# Altium PCB ESP_Träger.PcbDoc
Units mil, origin at the board's own origin, x right, y up, seen from the top; angles counter-clockwise.
Board outline 1830.71 x 2960.63 mil, 2 copper layers (Top Layer, Bottom Layer); 7 components, 29 nets, 76 pads, 3 vias.
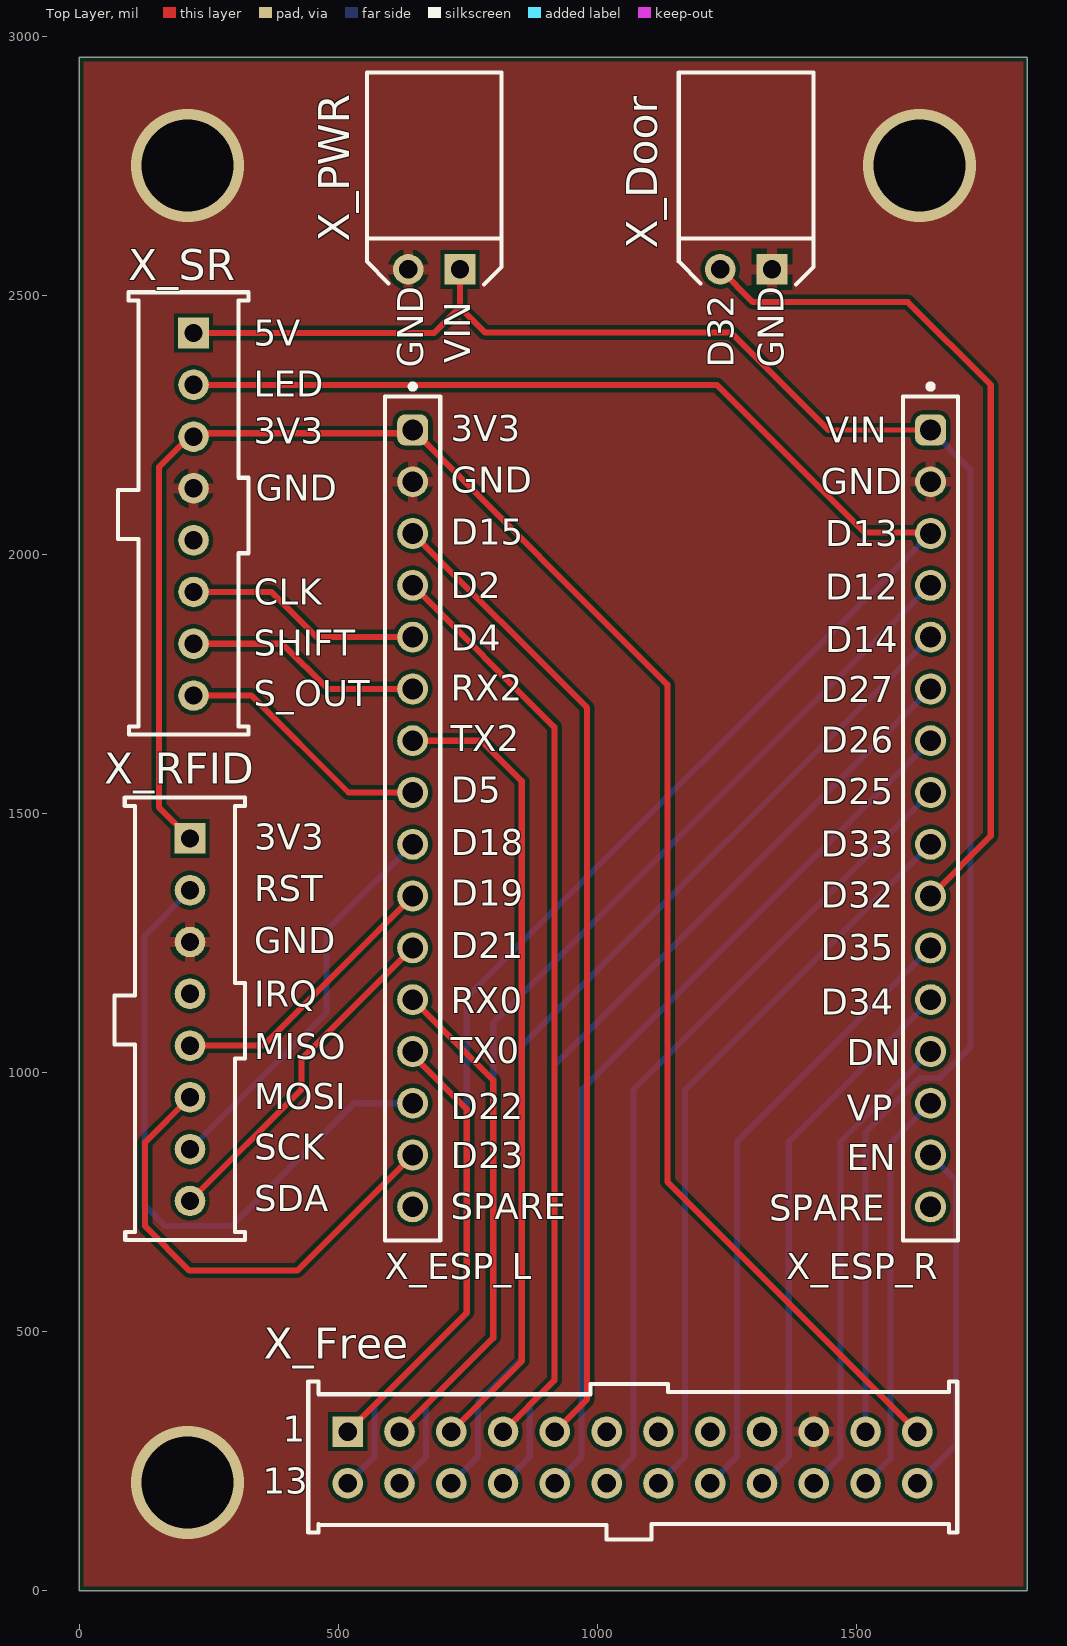
[diagram p0: Top Layer view]
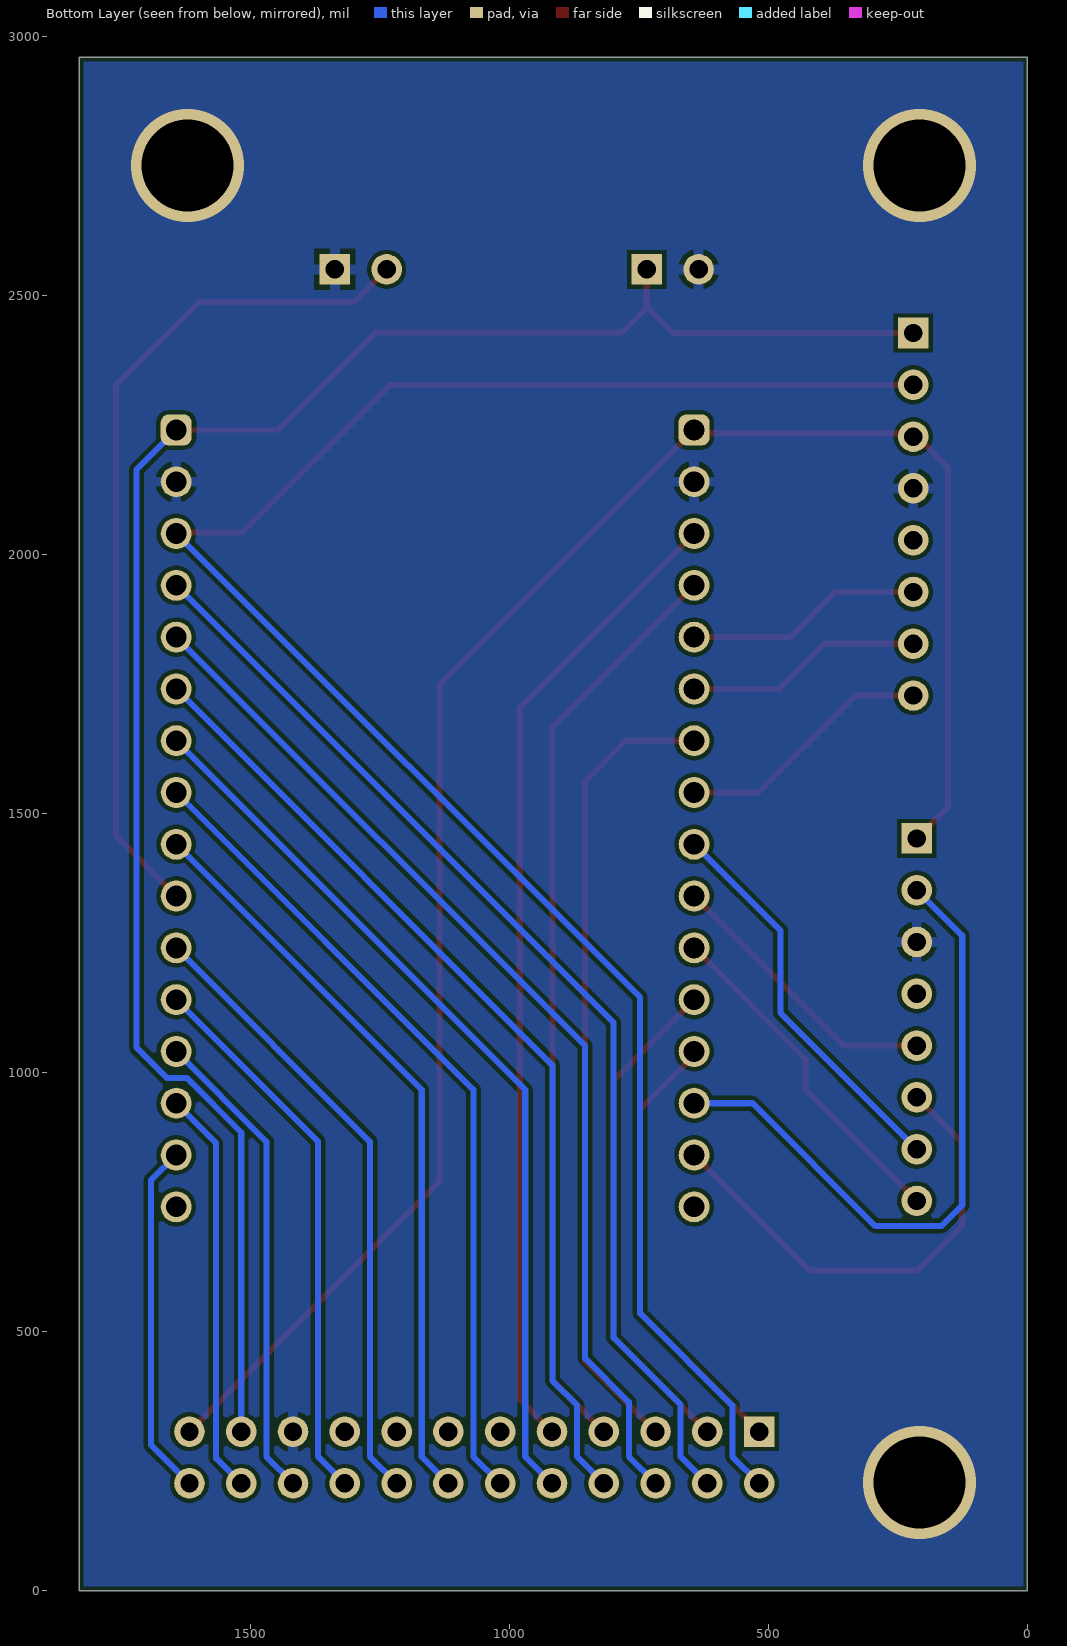
[diagram p1: Bottom Layer view, seen from below]
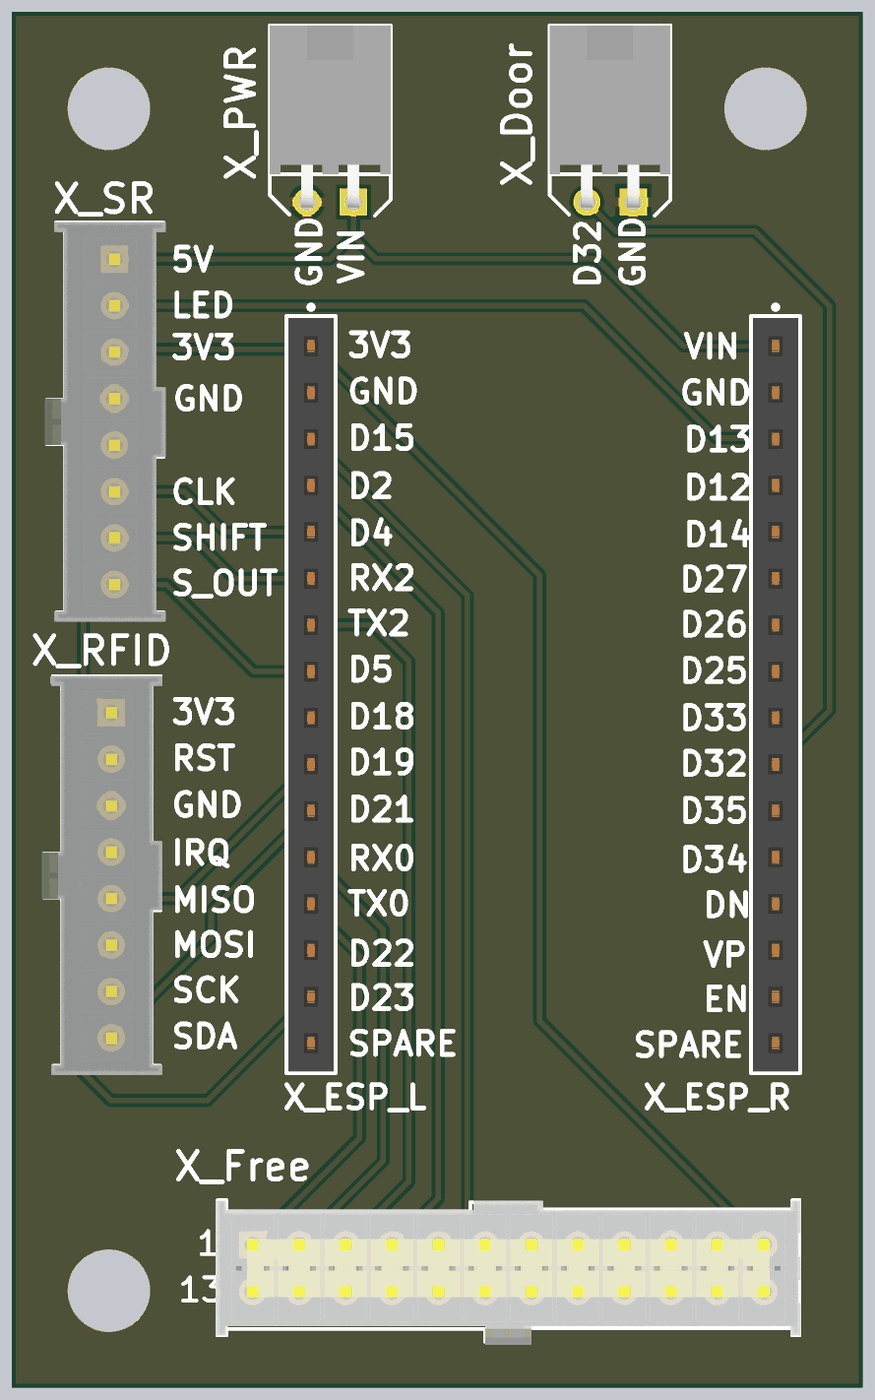
[diagram p2: 3D render of the assembled board from above, using the file's embedded part models]

## Layer stack, top to bottom
Top Solder: solder mask 0.4, Solder Resist, Dk 3.5
Top Layer: signal copper 1.4
Dielectric 1: dielectric 12.6, FR-4, Dk 4.8
Bottom Layer: signal copper 1.4
Bottom Solder: solder mask 0.4, Solder Resist, Dk 3.5

## Board outline
0,0 1830.71,0 1830.71,2960.63 0,2960.63

## Design rules (kind name [scope] priority, off if disabled: settings)
BoardOutlineClearance [All] p1: gap=7.87 ignorepadtopadclearanceinfootprint=FALSE except(0.79: Text-OutlineEdge Text-CutoutEdge; 15.75: Arc-SplitBarrior Arc-SplitContinuation Track-SplitBarrior Track-SplitContinuation SMDPad-SplitBarrior SMDPad-SplitContinuation THPad-SplitBarrior THPad-SplitContinuation Via-SplitBarrior Via-SplitContinuation Fill-SplitBarrior Fill-SplitContinuation Poly-SplitBarrior Poly-SplitContinuation Region-SplitBarrior Region-SplitContinuation Text-SplitBarrior Text-SplitContinuation)
Clearance "Stitching GND" [IsStitchingVia and InNet('GND') vs (IsVia and (Not IsStitchingVia)) Or IsPad] p1: gap=5 ignorepadtopadclearanceinfootprint=FALSE
Clearance [All] p2: gap=7.87 ignorepadtopadclearanceinfootprint=FALSE except(5: Arc-Arc Arc-Track Arc-SMDPad Track-Track Track-SMDPad SMDPad-SMDPad SMDPad-Via THPad-Via Via-Via; 10: Arc-Via Arc-Text Track-Via Track-Text SMDPad-Text THPad-Text Via-Text Fill-Text Poly-Text Region-Text Text-Text; 12.99: Arc-THPad Track-THPad; 19.68: THPad-THPad)
HoleSize [All] p1: absolutevalues=TRUE maxlimit=248.03 minlimit=7.87 maxpercent=80.000 minpercent=20.000
HoleToHoleClearance [All] p1: gap=19.68 allowstackedmicrovias=TRUE
MinimumAnnularRing [All] p1: minimumring=5.12
MinimumSolderMaskSliver [All] p1: minsoldermaskwidth=3.94
PasteMaskExpansion [All] p1: expansion=-3.15
PlaneConnect [All] p1: pad.planeconnectstyle=Relief pad.reliefexpansion=20 pad.reliefentries=4 pad.reliefconductorwidth=10 pad.reliefairgap=10 via.planeconnectstyle=Direct via.reliefexpansion=20 via.reliefentries=4 via.reliefconductorwidth=10 via.reliefairgap=10
PolygonConnect [All] p1: thpad.connectstyle=Relief thpad.reliefconductorwidth=20 thpad.reliefentries=4 thpad.polygonreliefangle="90 Angle" thpad.airgapwidth=10 smdpad.connectstyle=Relief smdpad.reliefconductorwidth=20 smdpad.reliefentries=4 smdpad.polygonreliefangle="90 Angle" smdpad.airgapwidth=10 via.connectstyle=Direct via.reliefconductorwidth=20 via.reliefentries=4 via.polygonreliefangle="90 Angle" via.airgapwidth=10
RoutingCorners [All] p1: cornerstyle=Round minsetback=100 maxsetback=100
RoutingVias [All] p1: holewidth=19.68 width=39.37 viastyle="Through Hole" minholewidth=7.87 minwidth=17.72 maxholewidth=39.37 maxwidth=78.74
SilkToSilkClearance [All] p1: silktosilkclearance=3.94
SilkToSolderMaskClearance [IsPad] p1: minsilkscreentomaskgap=3.94 clearancetoexposedcopper=TRUE
SolderMaskExpansion SolderMaskExpansion_VS [ViaSize < 1.0] p1: expansion=1.97 istentingtop=FALSE soldermaskfromhole=TRUE // JLC
SolderMaskExpansion [All] p2: expansion=1.97 istentingtop=FALSE useseparateexpansions=TRUE expansionbottom=1.97 istentingbottom=FALSE // JLC
UnRoutedNet [All] p1: checkbadconnections=TRUE
Width [All] p1: maxlimit=100 minlimit=7.87 preferedwidth=11.81 minimp=50.000000 maximp=50.000000 favimp=50.000000
21 further rules are at their usual default settings.

## Classes and differential pairs
component class U_ESP_32: X_ESP_L X_ESP_R
component class ESP_Trägerplatine: X_Door X_Free X_PWR X_RFID X_SR

## Components (designator, comment, footprint, x,y, rotation, side; value= is the part's Value field where it differs from the comment)
X_Door "Samtec-IPL1-102-01-L-S-RA-K" Samtec-IPL1-102-01-L-S-RA-K 1287.4,2551.18 r90 top
X_ESP_L "61301611821" 61301611821 643.65,1491.15 r270 top (schematic designator X_ESP_L?)
X_ESP_R "61301611821" 61301611821 1643.65,1491.15 r270 top (schematic designator X_ESP_R?)
X_Free "Samtec-IPL1-112-01-L-D-K" Samtec-IPL1-112-01-L-D-K 1068.11,257.09 r0 top
X_PWR "Samtec-IPL1-102-01-L-S-RA-K" Samtec-IPL1-102-01-L-S-RA-K 685.04,2551.18 r90 top
X_RFID "Samtec-IPL1-108-01-L-S-K" Samtec-IPL1-108-01-L-S-K 213.65,1102.45 r270 top
X_SR "Samtec-IPL1-108-01-L-S-K" Samtec-IPL1-108-01-L-S-K 220.47,2078.35 r270 top

## Footprints (in the part's own frame and the unit in brackets; to place one, negate y for a bottom-side part, rotate by r counter-clockwise, add the part's x,y. Pads: shape width x height; smd on the part's side, far side on the other; paste and mask are expansions set on the pad)
61301611821 [mm] "Socket Header, Pitch 2.54 mm, THT, Vertical, single row, 16p"
  rrect50% 1.52x1.52 hole 1.02: 1(-19.05,0)
  round 1.52 hole 1.02: 2(-16.51,0) 3(-13.97,0) 4(-11.43,0) 5(-8.89,0) 6(-6.35,0) 7(-3.81,0) 8(-1.27,0) 9(1.27,0) 10(3.81,0) 11(6.35,0) 12(8.89,0) 13(11.43,0) 14(13.97,0) 15(16.51,0) 16(19.05,0)
  silkscreen extent -21.3,-1.35 20.7,1.35, body extent -20.57,-1.25 20.57,1.25, height 8.55
Samtec-IPL1-102-01-L-S-RA-K [mm]
  rect 1.5x1.5 hole 0.9: 1(0,-1.27)
  round 1.5 hole 0.9: 2(0,1.27)
  silkscreen extent -0.74,-3.3 9.66,3.3, body extent -0.31,-3.3 9.66,3.3, height 6.62
Samtec-IPL1-108-01-L-S-K [mm]
  rect 1.5x1.5 hole 0.9: 1(-8.89,0)
  round 1.5 hole 0.9: 2(-6.35,0) 3(-3.81,0) 4(-1.27,0) 5(1.27,0) 6(3.81,0) 7(6.35,0) 8(8.89,0)
  silkscreen extent -10.89,-3.7 10.81,2.7, body extent -10.91,-3.8 10.93,2.8, height 8.14
Samtec-IPL1-112-01-L-D-K [mm]
  rect 1.5x1.5 hole 0.9: 1(-13.97,1.27)
  round 1.5 hole 0.9: 2(-11.43,1.27) 3(-8.89,1.27) 4(-6.35,1.27) 5(-3.81,1.27) 6(-1.27,1.27) 7(1.27,1.27) 8(3.81,1.27) 9(6.35,1.27) 10(8.89,1.27) 11(11.43,1.27) 12(13.97,1.27) 13(-13.97,-1.27) 14(-11.43,-1.27) 15(-8.89,-1.27) 16(-6.35,-1.27) 17(-3.81,-1.27) 18(-1.27,-1.27) 19(1.27,-1.27) 20(3.81,-1.27) 21(6.35,-1.27) 22(8.89,-1.27) 23(11.43,-1.27) 24(13.97,-1.27)
  silkscreen extent -15.91,-4.02 15.93,3.73, body extent -16,-4.19 16,3.68, height 8.65

## Part data
X_Door X_PWR: "Samtec IPL1 .100\", 2polig, eine Reihe, 90° gewinkelt", Manufacturer=Samtec, Part Number=IPL1-102-01-L-S-RA-K
X_ESP_L X_ESP_R: library part CMP-1502-01343-3, Contact Resistance=20mΩ, Current Rating=3A, Operating Supply Voltage=250V, Contact Material=Copper, Gender=Female, Lead Free="Lead Free", Lead Pitch=2.54mm, NexarPartId=23389750, Number of Pins=16, Orientation=Vertical, RoHS=Compliant
X_Free: library part IPL1-112-01-L-D-K, "Header, 12-Pin, Dual row", LatestRevisionDate=17-Jul-2002, LatestRevisionNote="Re-released for DXP Platform.", Publisher="Altium Limited"
X_RFID: "Samtec IPL1 .100\", 8-polig, eine Reihe", Manufacturer=Samtec, Part Number=IPL1-108-01-L-S-K
X_SR: library part IPL1-108-01-L-S-K, "Header, 8-Pin", LatestRevisionDate=17-Jul-2002, LatestRevisionNote="Re-released for DXP Platform.", Publisher="Altium Limited"

## Via types
v1: diameter 218, hole 177.17, Top Layer to Bottom Layer, tented both sides, 3 vias

## Nets (pads, with @x,y where several pads share a name; then routed paths per layer and width w, separated by ;. In a path a pad name is that pad's centre, name@x,y a point inside that pad or via, vN(x,y) a via of type N, cw(c..) or ccw(c..) an arc to the next point about the centre after c; other vN are vias at no path point)
3V3: X_ESP_L.1 X_Free.12 X_RFID.1 X_SR.3 | length 3599.3
  Top Layer w11.81: X_RFID.1 153.54,1512.55 153.54,2169.29 212.6,2228.35 X_SR.3 226.87,2234.75 637.25,2234.75 X_ESP_L.1 1135.57,1749.22 1135.57,789.63 X_Free.12
ESP_DN: X_ESP_R.13 X_Free.22 | length 927.5
  Bottom Layer w11.81: X_Free.22 1469.68,258.66 1469.68,867.19 X_ESP_R.13
ESP_EN: X_ESP_R.15 X_Free.24 | length 685.1
  Bottom Layer w11.81: X_Free.24 1692.47,281.44 1692.47,792.33 X_ESP_R.15
ESP_IO2: X_ESP_L.4 X_Free.4 | length 1788.5
  Top Layer w11.81: X_ESP_L.4 917.32,1667.47 917.32,406.3 X_Free.4
ESP_IO12: X_ESP_R.4 X_Free.14 | length 2158.9
  Bottom Layer w11.81: X_Free.14 669.68,258.66 669.68,358.66 799.21,488.19 799.21,1096.71 X_ESP_R.4
ESP_IO14: X_ESP_R.5 X_Free.15 | length 2017.4
  Bottom Layer w11.81: X_Free.15 769.68,258.66 769.68,364.17 854.33,448.82 854.33,1051.83 X_ESP_R.5
ESP_IO15: X_ESP_L.3 X_Free.5 | length 1899.3
  Top Layer w11.81: X_ESP_L.3 980.32,1704.48 980.32,369.29 X_Free.5
ESP_IO25: X_ESP_R.8 X_Free.18 | length 1593.2
  Bottom Layer w11.81: X_Free.18 1069.68,258.66 1069.68,967.19 X_ESP_R.8
ESP_IO26: X_ESP_R.7 X_Free.17 | length 1734.6
  Bottom Layer w11.81: X_Free.17 969.68,258.66 969.68,967.19 X_ESP_R.7
ESP_IO27: X_ESP_R.6 X_Free.16 | length 1876
  Bottom Layer w11.81: X_Free.16 869.68,258.66 869.68,357.87 917.32,405.51 917.32,1014.82 X_ESP_R.6
ESP_IO33: X_ESP_R.9 X_Free.19 | length 1451.7
  Bottom Layer w11.81: X_Free.19 1169.68,258.66 1169.68,967.19 X_ESP_R.9
ESP_IO34: X_ESP_R.12 X_Free.21 | length 1068.9
  Bottom Layer w11.81: X_Free.21 1369.68,258.66 1369.68,867.19 X_ESP_R.12
ESP_IO35: X_ESP_R.11 X_Free.20 | length 1210.3
  Bottom Layer w11.81: X_Free.20 1269.68,258.66 1269.68,867.19 X_ESP_R.11
ESP_RX0: X_ESP_L.12 X_Free.2 | length 973.5
  Top Layer w11.81: X_Free.2 799.21,488.19 799.21,985.58 X_ESP_L.12
ESP_TX0: X_ESP_L.13 X_Free.1 | length 872.5
  Top Layer w11.81: X_Free.1 748.03,537.01 748.03,929.13 643.65,1033.52 X_ESP_L.13
ESP_TX2: X_ESP_L.7 X_Free.3 | length 1555.4
  Top Layer w11.81: X_ESP_L.7 776.17,1641.15 854.33,1562.99 854.33,443.31 X_Free.3
ESP_VP: X_ESP_R.14 X_Free.23 | length 786.1
  Bottom Layer w11.81: X_Free.23 1566.54,255.51 1566.54,864.04 X_ESP_R.14
GND: X_Door.1 X_ESP_L.2 X_ESP_R.2 X_Free.10 X_PWR.2 X_RFID.3 X_SR.4
  other v1: 208.66,208.66 208.66,2751.97 1622.05,2751.97
LED_Enable: X_ESP_R.3 X_Free.13 X_SR.2 | length 3842.4
  Top Layer w11.81: X_SR.2 1230.71,2328.35 1515.75,2043.31 1641.49,2043.31 X_ESP_R.3
  Bottom Layer w11.81: X_Free.13 569.68,258.66 569.68,357.09 748.03,535.43 748.03,1145.53 X_ESP_R.3
RFID_MISO: X_ESP_L.10 X_RFID.5 | length 549.6
  Top Layer w11.81: X_RFID.5 354.95,1052.45 X_ESP_L.10
RFID_MOSI: X_ESP_L.15 X_RFID.6 | length 929.2
  Top Layer w11.81: X_RFID.6 126.94,865.74 126.94,703.77 212.6,618.11 420.61,618.11 X_ESP_L.15
RFID_RST: X_ESP_L.14 X_RFID.2 | length 1277.1
  Bottom Layer w11.81: X_RFID.2 125.98,1264.79 125.98,744.09 166.06,704.02 293.56,704.02 530.68,941.15 X_ESP_L.14
RFID_SCK: X_ESP_L.9 X_RFID.7 | length 766.8
  Bottom Layer w11.81: X_RFID.7 477.23,1116.04 477.23,1274.74 X_ESP_L.9
RFID_SDA: X_ESP_L.11 X_RFID.8 | length 666.8
  Top Layer w11.81: X_RFID.8 428.57,967.37 428.57,1026.07 X_ESP_L.11
SR_CLK: X_ESP_L.5 X_SR.6 | length 459.3
  Top Layer w11.81: X_SR.6 370.87,1928.35 458.06,1841.15 X_ESP_L.5
SR_SHIFT: X_ESP_L.6 X_SR.7 | length 459.3
  Top Layer w11.81: X_SR.7 392.13,1828.35 479.32,1741.15 X_ESP_L.6
SR_SOut: X_ESP_L.8 X_SR.8 | length 500.7
  Top Layer w11.81: X_SR.8 332.49,1728.35 519.68,1541.15 X_ESP_L.8
VIN: X_ESP_R.1 X_Free.11 X_PWR.1 X_SR.1 | length 3686.2
  Top Layer w10: 1446.44,2241.15 X_ESP_R.1
  Top Layer w11.81: X_SR.1 684.25,2428.35 735.04,2479.13 X_PWR.1 ; 735.04,2477.56 783.46,2429.13 1258.46,2429.13 1446.44,2241.15
  Bottom Layer w11.81: X_Free.11 1518.11,884.65 1623.43,989.97 1661.51,989.97 1720.47,1048.93 1720.47,2164.32 X_ESP_R.1
X_Door_Check: X_Door.2 X_ESP_R.10 | length 1649.9
  Top Layer w11.81: X_Door.2 1300.39,2488.19 1599.71,2488.19 1759.84,2328.05 1759.84,1457.34 X_ESP_R.10
pads on no net: X_ESP_L.16 X_ESP_R.16 X_Free.6 X_Free.7 X_Free.8 X_Free.9 X_RFID.4 X_SR.5

## Polygon pours and split planes (outlines as drawn)
GND on Top Layer "Ground_TopLayer" (solid, pour order 0): 0,2960.63 0,0 1834.65,0 1830.71,3.94 1830.71,2960.63
GND on Bottom Layer "Ground_BotLayer" (solid, pour order 1): 0,2960.63 0,0 1830.71,0 1830.71,2960.63

## Silkscreen, mask and mechanical layers (free items; w line width, h text height)
Top Overlay:
  text "5V" at 336.77,2403.7 h50
  text "VIN" at 754.36,2369.72 h50 r90
  text "GND" at 663.8,2361.38 h50 r90
  text "D32" at 1263.21,2361.38 h50 r90
  text "GND" at 1359.67,2361.39 h50 r90
  text "LED" at 336.77,2305.28 h50
  text "3V3" at 716.71,2219.65 h50
  text "VIN" at 1440.17,2216.7 h50
  text "3V3" at 336.77,2214.72 h50
  text "GND" at 716.71,2120.24 h50
  text "GND" at 1431.84,2117.29 h50
  text "GND" at 340.71,2104.49 h50
  text "D15" at 716.71,2019.85 h50
  text "D13" at 1440.17,2016.9 h50
  text "D2" at 716.71,1916.5 h50
  text "D12" at 1440.17,1913.55 h50
  text "CLK" at 336.77,1903.7 h50
  text "D4" at 716.71,1815.12 h50
  text "D14" at 1440.17,1812.17 h50
  text "SHIFT" at 336.77,1805.28 h50
  text "RX2" at 716.71,1718.67 h50
  text "D27" at 1431.84,1715.72 h50
  text "S_OUT" at 336.77,1707.31 h50
  text "TX2" at 716.71,1621.23 h50
  text "D26" at 1431.84,1618.27 h50
  text "D5" at 716.71,1521.82 h50
  text "D25" at 1431.84,1518.87 h50
  text "3V3" at 337.77,1430.28 h50
  text "D18" at 716.71,1420.44 h50
  text "D33" at 1431.84,1417.49 h50
  text "RST" at 337.77,1330.87 h50
  text "D19" at 716.71,1322.01 h50
  text "D32" at 1431.84,1319.06 h50
  text "GND" at 337.77,1230.48 h50
  text "D21" at 716.71,1220.64 h50
  text "D35" at 1431.84,1217.68 h50
  text "IRQ" at 337.77,1127.13 h50
  text "RX0" at 716.71,1115.32 h50
  text "D34" at 1431.84,1112.37 h50
  text "MISO" at 337.77,1025.76 h50
  text "TX0" at 716.71,1017.88 h50
  text "DN" at 1481.82,1014.93 h50
  text "MOSI" at 337.77,929.3 h50
  text "D22" at 716.71,910.6 h50
  text "VP" at 1481.82,907.64 h50
  text "SCK" at 337.77,831.86 h50
  text "D23" at 716.71,815.12 h50
  text "EN" at 1481.82,812.17 h50
  text "SDA" at 337.77,732.45 h50
  text "SPARE" at 716.71,716.7 h50
  text "SPARE" at 1331.87,713.75 h50
Mechanical 1:
  the board outline again, w10

## Text inside footprints (layer, text, board x,y; h text height)
X_Free: Top Overlay "13" at 353.74,187.09 h50; Top Overlay "1" at 393.11,287.09 h50